# Altium PCB CCM4201S_MAIN_Board_V1-PIJIAKUN_20260819_PCB.PcbDoc
Units mm, origin at the board's own origin, x right, y up, seen from the top; angles counter-clockwise.
Board outline 50 x 30 mm, 2 copper layers (Top Layer, Bottom Layer); 74 components, 59 nets, 225 pads, 142 vias.
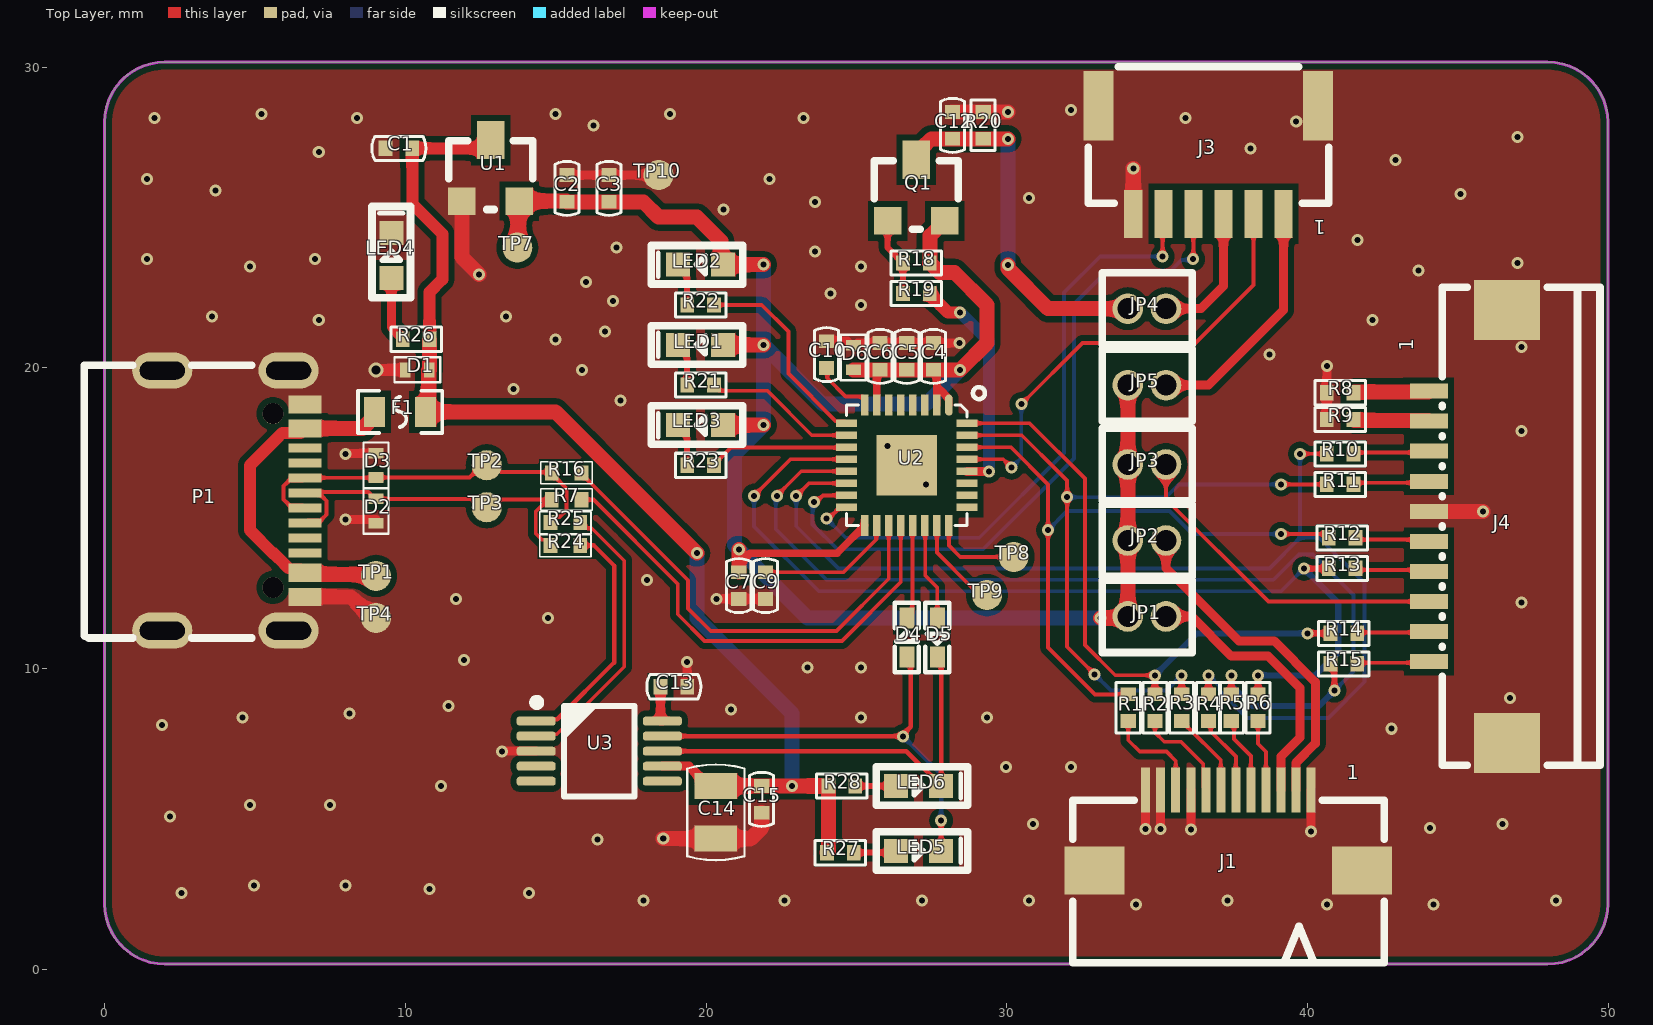
[diagram p0: Top Layer view]
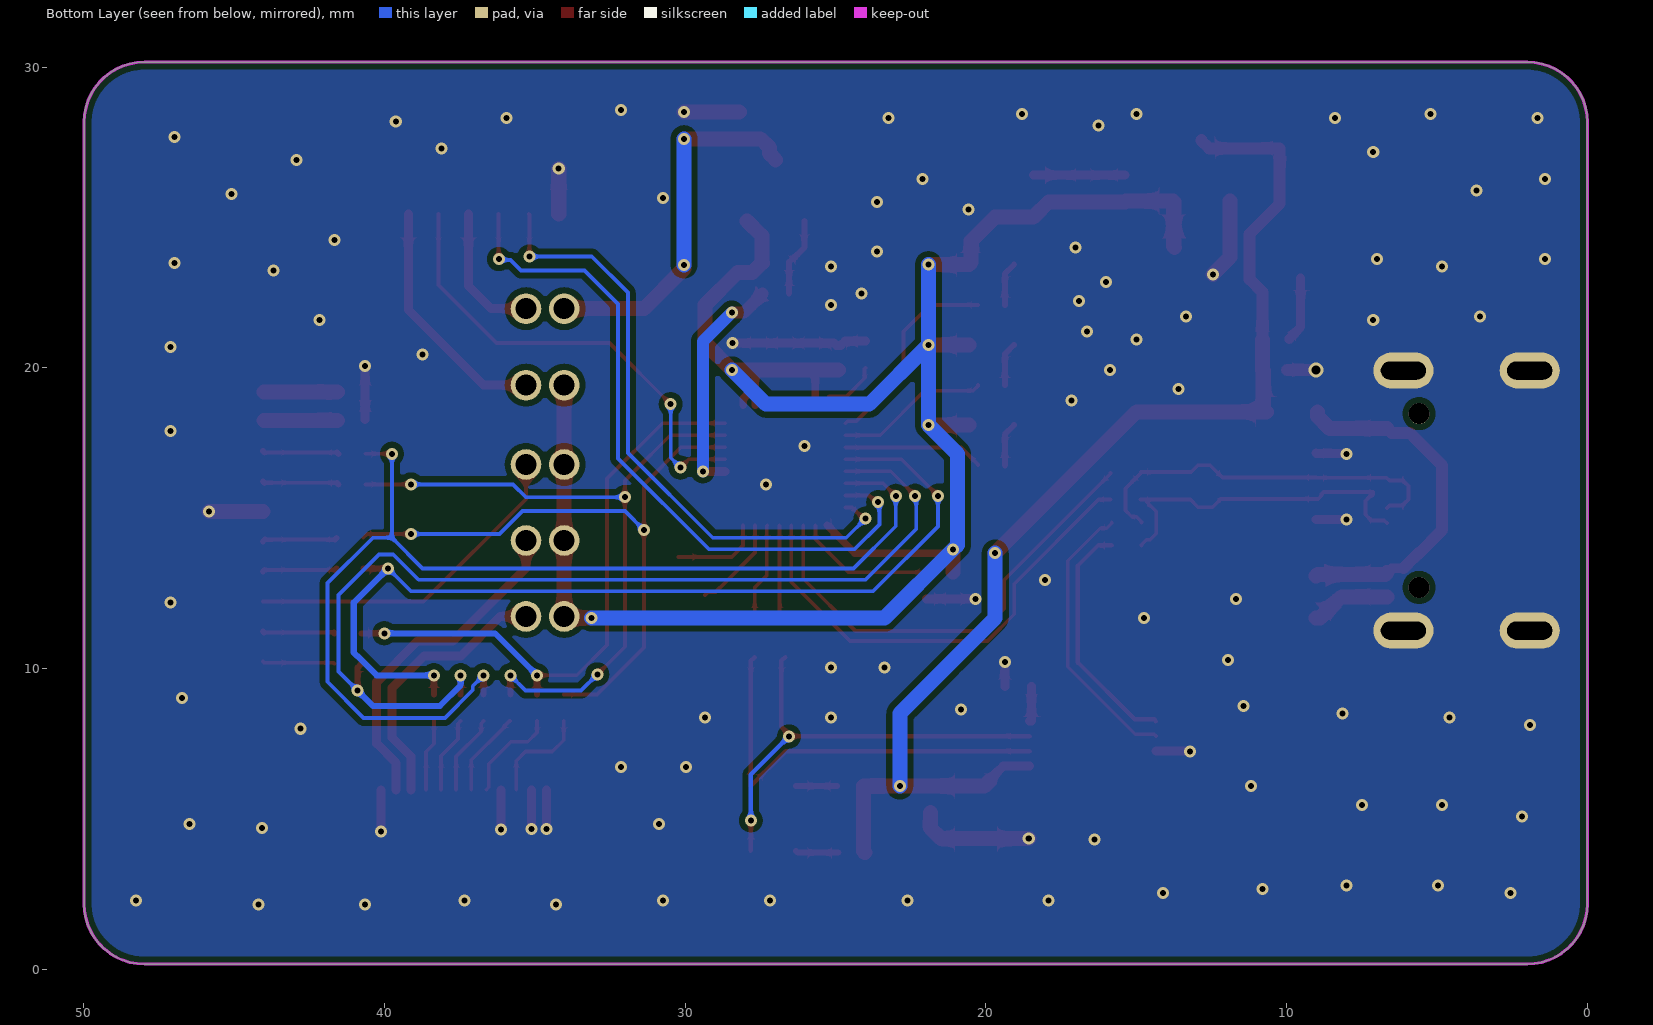
[diagram p1: Bottom Layer view, seen from below]

## Layer stack, top to bottom
Top Solder: solder mask 0.0102, Solder Resist, Dk 3.5
Top Layer: signal copper 0.0356
Dielectric 1: dielectric 0.32, FR-4, Dk 4.8
Bottom Layer: signal copper 0.0356
Bottom Solder: solder mask 0.0102, Solder Resist, Dk 3.5

## Board outline
-0.011,2.173 -0.011,28.173 cw(c1.989,28.173) 1.989,30.173 47.989,30.173 cw(c47.989,28.173) 49.989,28.173 49.989,2.173 cw(c47.989,2.173) 47.989,0.173 1.989,0.173 cw(c1.989,2.173)

## Design rules (kind name [scope] priority, off if disabled: settings)
BoardOutlineClearance [All] p1: gap=0 ignorepadtopadclearanceinfootprint=FALSE
Clearance GND_POUR [InPolygon] p1: gap=0.2 ignorepadtopadclearanceinfootprint=FALSE
Clearance Clearance_1 [All] p2: gap=0.01 ignorepadtopadclearanceinfootprint=FALSE
HoleToHoleClearance [All] p1: gap=0 allowstackedmicrovias=TRUE
MinimumSolderMaskSliver [All] p1: minsoldermaskwidth=0
PolygonConnect [All] p1: connectstyle=Direct reliefconductorwidth=0.254 reliefentries=4 polygonreliefangle="90 Angle" airgapwidth=0.254
RoutingVias [All] p1: holewidth=0.711 width=1.27 viastyle="Through Hole" minholewidth=0.711 minwidth=1.27 maxholewidth=0.711 maxwidth=1.27
SilkToSilkClearance [All] p1: silktosilkclearance=0
SilkToSolderMaskClearance [IsPad] p1: minsilkscreentomaskgap=0 clearancetoexposedcopper=TRUE
SolderMaskExpansion [All] p1: expansion=0.102 istentingtop=FALSE
Width [All] p1: maxlimit=1 minlimit=0.1 preferedwidth=0.2
26 further rules are at their usual default settings.

## Components (designator, comment, footprint, x,y, rotation, side; value= is the part's Value field where it differs from the comment)
C1 "1uF/16V" 0402C 9.779,27.305 r180 top
C2 "4.7uF/6.3V" 0402C 15.367,25.971 r90 top
C3 "0.1uF" 0402C 16.764,25.971 r90 top
C4 "4.7uF" 0402C 27.559,20.383 r90 top
C5 "0.1uF" 0402C 26.67,20.383 r90 top
C6 "0.1uF" 0402C 25.781,20.383 r270 top
C7 "0.1uF" 0402C 21.082,12.763 r270 top
C9 "0.1uF" 0402C 21.971,12.763 r270 top
C10 "1uF" 0402C 24.003,20.447 r90 top
C12 "2.2uF" 0402C 28.194,28.067 r90 top
C13 "0.1uF" 0402C 18.923,9.398 r0 top
C14 "10uF" L0805 20.32,5.221 r270 top
C15 "0.1uF" 0402C 21.844,5.651 r270 top
D1 "SES1201NT/SSC" TVS0402(M) 10.389,19.939 r0 top
D2 "ESD5311N-2/TR" TVS0402(M) 9.017,15.24 r90 top
D3 "ESD5311N-2/TR" TVS0402(M) 9.017,16.764 r270 top
D4 "B0520X" SOD523 26.67,11.034 r270 top value=B0520
D5 "B0520X" SOD523 27.686,11.034 r90 top value=B0520
D6 "RSD6368FT" TVS0402(M) 24.892,20.345 r90 top value=RSFK9D3NT
F1 "FUSE" 0603-PUSE 9.818,18.542 r0 top value=500MA
J1 "PIN-12" PIN-12 37.366,4.629 r180 top locked
J3 "PIN6-CON" XH6PIN_1.0MM 36.703,26.924 r180 top locked
J4 "AFA01-S10FCA-00" FPC-SMD_10P-P1.0_FGS-XJ-H2.0 45.339,14.732 r270 top locked
JP1 "CONDIP2_A" PAIZHEN-1.27-2P 34.671,11.736 r0 top locked value=4.2V/0.5A
JP2 "CONDIP2_A" PAIZHEN-1.27-2P 34.671,14.263 r0 top locked value=4.2V/0.5A
JP3 "CONDIP2_A" PAIZHEN-1.27-2P 34.671,16.79 r0 top locked value=4.2V/0.5A
JP4 "CONDIP2_A" PAIZHEN-1.27-2P 34.671,21.971 r0 top value=4.2V/0.5A
JP5 "CONDIP2_A" PAIZHEN-1.27-2P 34.671,19.431 r0 top value=4.2V/0.5A
LED1 "LED_G" LED_G 19.812,20.701 r180 top
LED2 "LED_B" LED_G 19.812,23.368 r180 top
LED3 "LED_R" LED_G 19.812,18.034 r180 top
LED4 "LED_R" LED_G 9.458,23.736 r90 top
LED5 "LED_R" LED_G 27.062,4.004 r0 top
LED6 "LED_R" LED_G 27.062,6.163 r0 top
P1 "TYPE-C_16PIN_2MD(073)" USB-C-SMD_TYPE-C-6PIN-2MD-073 4.283,15.59 r270 top locked
Q1 "CJ3139K/SOT23" SOT23 26.987,25.883 r0 top
R1 "R0402" 0402R 34.036,8.7 r270 top value=0R
R2 "R0402" 0402R 34.925,8.7 r270 top value=0R
R3 "R0402" 0402R 35.814,8.7 r270 top value=0R
R4 "R0402" 0402R 36.703,8.7 r270 top value=0R
R5 "R0402" 0402R 37.465,8.7 r270 top value=0R
R6 "R0402" 0402R 38.354,8.7 r270 top value=0R
R7 "R0402" 0402R_RANGE 15.303,15.621 r0 top value=0R
R8 "R0402" 0402R 41.084,19.177 r0 top value=0R
R9 "R0402" 0402R 41.084,18.288 r0 top value=0R
R10 "R0402" 0402R 41.084,17.145 r0 top value=0R
R11 "R0402" 0402R 41.084,16.129 r0 top value=0R
R12 "R0402" 0402R 41.148,14.351 r0 top value=0R
R13 "R0402" 0402R 41.148,13.335 r0 top value=0R
R14 "R0402" 0402R 41.212,11.176 r0 top value=0R
R15 "R0402" 0402R 41.212,10.16 r0 top value=0R
R16 "R0402" 0402R_RANGE 15.303,16.51 r0 top value=0R
R18 "100K" 0402R 26.987,23.495 r0 top
R19 "1K" 0402R 26.987,22.479 r180 top
R20 "20K" 0402R 29.21,28.067 r270 top
R21 "1K" 0402R 19.812,19.431 r180 top
R22 "1K" 0402R 19.812,22.098 r180 top
R23 "1K" 0402R 19.812,16.764 r180 top
R24 "33R" 0402R_RANGE 15.367,14.097 r180 top
R25 "33R" 0402R_RANGE 15.367,14.859 r180 top
R26 "1K" 0402R 10.351,20.955 r0 top
R27 "1K" 0402R 24.459,3.877 r180 top
R28 "1K" 0402R 24.511,6.096 r180 top
TP1 "TP12" TPAA 9.017,13.081 r90 top
TP2 "TP12" TPAA 12.7,16.764 r0 top
TP3 "TP12" TPAA 12.7,15.367 r0 top
TP4 "TP12" TPAA 9.017,11.684 r90 top
TP7 "TP12" TPAA 13.716,24.003 r90 top
TP8 "TP12" TPAA 30.226,13.716 r90 top
TP9 "TP12" TPAA 29.337,12.446 r90 top
TP10 "TP12" TPAA 18.415,26.416 r90 top
U1 "ME6230A33M3G/MICRONE" SOT23-3 12.827,26.543 r0 top
U2 "CCM4201S_QFN32" QFN32_4X4_0.4 26.67,16.764 r270 top
U3 "CH340E" MSOP-10 16.442,7.255 r0 top

## Footprints (in the part's own frame and the unit in brackets; to place one, negate y for a bottom-side part, rotate by r counter-clockwise, add the part's x,y. Pads: shape width x height; smd on the part's side, far side on the other; paste and mask are expansions set on the pad)
0402C [mil]
  rect 18x20 smd: 1(-17.5,0) 2(17.5,0)
  silkscreen extent -35,-16 35,16
0402R [mil]
  rect 18x20 smd: 1(-17.5,0) 2(17.5,0)
  silkscreen extent -33,-16 33,16
0402R_RANGE [mil]
  rect 18x20 smd: 1(-17.5,0) 2(21.44,0)
  silkscreen extent -31,-14 35,15
0603-PUSE [mm]
  rect 0.7x1 smd: 1(-0.85,0) 2(0.85,0)
  silkscreen extent -1.4,-0.7 1.4,0.7
FPC-SMD_10P-P1.0_FGS-XJ-H2.0 [mm]
  rect 0.5x1.25 smd: 1(-4.499,-1.3) 2(-3.499,-1.3) 3(-2.499,-1.3) 4(-1.499,-1.3) 5(-0.499,-1.3) 6(0.501,-1.3) 7(1.5,-1.3) 8(2.501,-1.3) 9(3.5,-1.3) 10(4.5,-1.3)
  rect 2x2.2 smd: 11(7.2,1.3) 12(-7.2,1.3)
  silkscreen extent -7.95,-0.86 7.94,4.39
L0805 [mil]
  rect 34x56 smd: 1(-34.45,0) 2(34.45,0)
  silkscreen extent -62,-38 63,38
LED_G [mm]
  rrect0% 0.8x0.8 smd: 1(-0.749,-0.067) 2(0.751,-0.067)
  silkscreen extent -1.4,-0.7 1.64,0.58
MSOP-10 [mm]
  rrect67% 1.3x0.3 smd: 1(-2.1,1) 2(-2.1,0.5) 3(-2.1,0) 4(-2.1,-0.5) 5(-2.1,-1) 6(2.1,-1) 7(2.1,-0.5) 8(2.1,0) 9(2.1,0.5) 10(2.1,1)
  silkscreen extent -2.2,-1.5 1.17,1.74
PAIZHEN-1.27-2P [mm]
  round 1.02 hole 0.7: 1(-0.65,0) 2(0.62,0)
  silkscreen extent -1.5,-1.2 1.5,1.2
PIN-12 [mm]
  rect 0.3x1.5 smd: 1(-2.75,-1.34) 2(-2.25,-1.34) 3(-1.75,-1.34) 4(-1.25,-1.34) 5(-0.75,-1.34) 6(-0.25,-1.34) 7(0.25,-1.34) 8(0.75,-1.34) 9(1.25,-1.34) 10(1.75,-1.34) 11(2.25,-1.34) 12(2.75,-1.34)
  rect 2x1.6 smd: 13(-4.45,1.34) 14(4.45,1.34)
  silkscreen extent -5.18,-0.99 5.18,4.41
QFN32_4X4_0.4 [mm]
  oval 0.7x0.25 smd: 1(-2,1.4)
  rect 0.7x0.25 smd: 2(-2,1) 3(-2,0.6) 4(-2,0.2) 5(-2,-0.2) 6(-2,-0.6) 7(-2,-1) 8(-2,-1.4) 17(2,-1.4) 18(2,-1) 19(2,-0.6) 20(2,-0.2) 21(2,0.2) 22(2,0.6) 23(2,1) 24(2,1.4)
  rect 0.25x0.7 smd: 9(-1.4,-2) 10(-1,-2) 11(-0.6,-2) 12(-0.2,-2) 13(0.2,-2) 14(0.6,-2) 15(1,-2) 16(1.4,-2) 25(1.4,2) 26(1,2) 27(0.6,2) 28(0.2,2) 29(-0.2,2) 30(-0.6,2) 31(-1,2) 32(-1.4,2)
  rect 2x2 smd: 33(0,0)
  silkscreen extent -2.6,-2 2,2.6
SOD523 [mm]
  rect 0.7x0.5 smd: A(0.65,0) K(-0.65,0)
  silkscreen extent -1.15,-0.4 1.15,0.4
SOT23 [mil]
  rect 36x36 smd: 1(-37.5,-39) 2(37.5,-39)
  rect 36x50 smd: 3(0,41)
  silkscreen extent -55,-50 55,40
SOT23-3 [mil]
  rect 36x36 smd: 1(-37.5,-39) 2(37.5,-39)
  rect 36x50 smd: 3(0,41)
  silkscreen extent -55,-50 55,40
TPAA [mm]
  round 1 smd: 1(0,0)
TVS0402(M) [mm]
  rect 0.35x0.5 smd: 1(-0.406,0) 2(0.406,0)
  silkscreen extent -0.76,-0.41 0.76,0.41
USB-C-SMD_TYPE-C-6PIN-2MD-073 [mm]
  rect 0.6x1.1 smd: 1(-3.2,2.375) 2(-2.4,2.375) 11(2.4,2.375) 12(3.2,2.375)
  rect 0.3x1.1 smd: 3(-1.75,2.375) 4(-1.25,2.375) 5(-0.75,2.375) 6(-0.25,2.375) 7(0.25,2.375) 8(0.75,2.375) 9(1.25,2.375) 10(1.75,2.375)
  oval 1.2x2 hole 0.6 slot 1.5 at 90 deg: 13(-4.325,1.825) 13(-4.325,-2.375) 14(4.325,1.825) 14(4.325,-2.375)
  round 0.7 hole 0.7 unplated mask+0.102: 15(-2.89,1.305) 16(2.89,1.305)
  silkscreen extent -4.5,-4.97 4.57,0.6
XH6PIN_1.0MM [mm]
  rect 0.6x1.6 smd paste+0 mask+0.05: 1(-2.5,1.8) 2(-1.5,1.8) 3(-0.5,1.8) 4(0.5,1.8) 5(1.5,1.8) 6(2.5,1.8)
  rect 1x2.3 smd paste+0 mask+0.05: 7(3.65,-1.8) 8(-3.65,-1.8)
  silkscreen extent -4,-3.1 4,1.45

## Part data
C1 C2: library part C0603X, "CAP, 10UF, 20%, 10V, X5R, 0603", Manufacturer="muRata (村田)", Manufacturer #1="村田 muRata", Geometry.Height=1.45000mm, PCB DECAL=0402C, PCB_DECAL=C0805, Process=SMT
C3 C5 C6 C7 C9: library part C0402, "CAP, 0.1uF, 10%, 10V, X5R, 0402", Manufacturer #1="村田 muRata", PCB DECAL=0402C
C4 C10: library part C0402, "CAP, 1UF, 10%, 10V, X5R, 0402", Manufacturer #1="村田 muRata", PCB DECAL=0402C
C12: library part C0201, "CAP, 2.2uF, 10%, 10V, X5R, 0201", Manufacturer #1="村田 muRata", PCB DECAL=0402C
C13 C15: library part C0201, "CAP, 0.1uF, 10%, 10V, X5R, 0201", Manufacturer #1="村田 muRata", PCB DECAL=0402C, Source_Path="D:\王君资料\客户资料\奥美佳\TDC5502\SCHEMATIC\改过原理图\TDC5502 1210B56101MN32SSD32FTD020EARIGBT.DSN"
C14: library part CAP+, "CAP, 10uF, 10%, 16V  6.3*5.3mm SMD", Geometry.Height=1.19990mm, PCB DECAL=L0805
D1: library part TVS0402(M), "TVS/12V", Manufacturer #1=MOTOROLA, Part Number=1.5KE220, PCB DECAL=TVS0402(M), Source_Path=D:\工作资料\指纹锁\电子烟\TF30X原理图\TF30X-GSL6165S-V00.DSN
D2 D3: library part TVS0402(M), "TVS/5V", Manufacturer #1=MOTOROLA, Part Number=1.5KE220, PCB DECAL=TVS0402(M), Source_Path=D:\工作资料\指纹锁\电子烟\TF30X原理图\TF30X-GSL6165S-V00.DSN
D4 D5: library part DIODE, PCB DECAL=SOD523
D6: library part TVS0402(M), "TRANSIENT VOLTAGE SUPPRESSOR, VBR=220V", Manufacturer #1=MOTOROLA, Part Number=1.5KE220, Geometry.Height=1.10007mm, PCB DECAL=TVS0402(M), Source_Path=D:\工作资料\指纹锁\电子烟\TF30X原理图\TF30X-GSL6165S-V00.DSN
J4: BOM_JLCPCB_Part_Class="Extended Part", BOM_Manufacturer=JUSHUO, BOM_Manufacturer_Part=AFA01-S10FCA-00, BOM_Supplier=LCSC, BOM_Supplier_Part=C262756, Contributor="1.0MM FPC连接座", PCB DECAL=FPC-SMD_10P-P1.0_FGS-XJ-H2.0, spicePre=F, spiceSymbolName=AFA01-S10FCA-00
JP1 JP2 JP3 JP4 JP5: "Rechargeable Battery", PCB DECAL=PAIZHEN-1.27-2P
LED1 LED2 LED3 LED4 LED5 LED6: library part OLED, Geometry.Height=1.100mm, PCB DECAL=LED_G
P1: Current_Rating___Power_(Max)=5A, JLCPCB_Part_Class="Extended Part", Manufacturer_Part="TYPE-C 16PIN 2MD(073)", Add_into_BOM=yes, Connector_Type=Type-C, Convert_to_PCB=yes, Datasheet=https://atta.szlcsc.com/upload/public/pdf/source/20211123/39B17C16241EAC15C5E277BDA434118E.pdf, Device="TYPE-C 16PIN 2MD(073)", Name=', Number_of_Contacts=16, Number_of_Ports=1, PCB DECAL=USB-C-SMD_TYPE-C-6PIN-2MD-073, Standard=-, supplier=LCSC, Supplier_Footprint=SMD, Supplier_Part=C2765186, Symbol="TYPE-C 16PIN 2MD(073)"
Q1: library part PMOS, "SOT23", Manufacturer #1=长电科技, PCB DECAL=SOT23
R1 R2 R3 R4 R5 R6 R7 R8 R9 R10 R11 R12 R13 R14 R15 R16: "RES,330R, 5%, 1/10W, 0201, SMD", Manufacturer #1=Yageo, Part_Name="RES 0201", PCB DECAL=0402R
R18 R19: library part R0402H, "RES 0603  4.7KΩ±1%  1/8W", PCB DECAL=0402R, PCB_DECAL=R0603, Process=SMT, Specification=spec
R20 R21 R22 R23 R26 R27 R28: library part R0402, "RES,20K, 5%, 1/10W, 0201, SMD", Manufacturer #1=Yageo, Part_Name="RES 0201", PCB DECAL=0402R
R24 R25: library part R0201, PCB DECAL=0402R, Source_Path="C:\PROGRAM FILES\ORCAD\CAPTURE\LIBRARY\DISCRETE.OLB"
TP1 TP2 TP3 TP4 TP7 TP8 TP9 TP10: "测试点，不需要贴片", PCB DECAL=TPAA
U1: library part TCS2115_C33, "3.3V  SOT23-3", Manufacturer #1=Torch_chip, PCB DECAL=SOT23-3
F1: PCB DECAL=0603-PUSE, Source_Path="C:\PROGRAM FILES\CADENCE\SPB_15.7\TOOLS\CAPTURE\LIBRARY\OLDLIBS\DEVICE.OLB"
J1: PCB DECAL=PIN-12
J3: PCB DECAL=XH6PIN_1.0MM
U2: PCB DECAL=QFN32_4X4_0.4
U3: Geometry.Height=1.09mm, PCB DECAL=MSOP-10

## Via types
v1: diameter 0.4, hole 0.2, Top Layer to Bottom Layer, tented both sides, 141 vias
v2: diameter 0.5, hole 0.3, Top Layer to Bottom Layer, tented both sides, 1 vias

## Nets (pads, with @x,y where several pads share a name; then routed paths per layer and width w, separated by ;. In a path a pad name is that pad's centre, name@x,y a point inside that pad or via, vN(x,y) a via of type N, cw(c..) or ccw(c..) an arc to the next point about the centre after c; other vN are vias at no path point)
5V: F1.1 P1.2 P1.11 TP1.1 | length 11.9
  Top Layer w0.3: 6.105,13.34 6.508,13.34 P1.11 ; P1.2@6.508,17.84 P1.2
  Top Layer w0.4: 5.587,13.843 4.826,14.604 4.826,16.764 5.715,17.653 5.902,17.84 P1.2@6.508,17.84 ; 5.588,13.843 5.593,13.838 ; 5.606,13.838 5.993,13.451 6.105,13.34
  Top Layer w0.5: P1.11 6.713,13.135 8.963,13.135 TP1.1 ; P1.2 7.874,17.99 8.566,17.99 8.968,18.392 F1.1
DM: R16.2 U2.19 | length 15.5
  Top Layer w0.127: R16.2 15.848,16.485 19.395,12.938 19.395,12.003 20.149,11.249 24.33,11.249 26.07,12.989 U2.19
DP: R7.2 U2.20 | length 15.9
  Top Layer w0.127: R7.2 16.249,15.621 19.05,12.82 19.05,11.811 19.939,10.922 24.511,10.922 26.47,12.881 U2.20
EGND1: J4.2 R9.2 | length 2.5
  Top Layer w0.2: R9.2 R9.2@41.558,18.259 ; J4.2@44.01,18.259 J4.2
  Top Layer w0.5: R9.2@41.558,18.259 J4.2@44.01,18.259
EGND2: J4.1 R8.2 | length 2.5
  Top Layer w0.2: R8.2 R8.2@41.556,19.204 ; J4.1@44.012,19.204 J4.1
  Top Layer w0.5: R8.2@41.556,19.204 J4.1@44.012,19.204
FP_INT: R5.1 R15.1 U2.13 | length 33.9
  Top Layer w0.127: v1(22.352,15.748) 22.352,15.756 22.911,16.315 23.16,16.564 U2.13
  Top Layer w0.2: R5.1 v1(37.465,9.779) ; R15.1 40.894,10.033 v1(40.894,9.271)
  Bottom Layer w0.127: v1(22.352,15.748) 22.311,15.707 22.311,14.646 24.003,12.954 38.862,12.954 39.706,13.798 40.177,13.798 41.529,12.446 41.529,9.906 v1(40.894,9.271)
  Bottom Layer w0.2: v1(37.465,9.779) 37.465,9.452 38.154,8.763 40.386,8.763 v1(40.894,9.271)
FP_RSTN: R6.1 R13.1 U2.12 | length 31.8
  Top Layer w0.127: v1(21.59,15.748) 22.806,16.964 U2.12
  Top Layer w0.2: R6.1 v1(38.354,9.779) ; v1(39.888,13.325) 39.893,13.33 40.698,13.33 R13.1
  Bottom Layer w0.127: v1(21.59,15.748) 21.59,14.732 23.749,12.573 39.116,12.573 39.868,13.325 v1(39.888,13.325)
  Bottom Layer w0.2: v1(38.354,9.779) 40.259,9.779 40.894,10.414 40.904,10.414 41.021,10.531 41.021,12.192 v1(39.888,13.325)
GND: C1.2 C2.2 C3.2 C4.2 C5.2 C6.1 C7.2 C9.2 C10.2 C12.2 C13.2 C14.2 C15.2 D1.1 D2.1 D3.1 D6.2 J1.1 J1.9 J1.11 J1.12 J1.13 J1.14 J3.6 J3.7 J3.8 J4.5 J4.11 J4.12 LED4.2 P1.1 P1.12 P1.13 P1.14 R8.1 R9.1 R20.1 TP4.1 TP10.1 U1.1 U2.33 U3.3 | length 35.6
  Top Layer w0.3: v1(8.001,14.961) D2.1@9.017,14.961 ; v1(8.001,17.145) 8.014,17.158 9.004,17.158 D3.1 ; v1(13.208,7.239) 13.224,7.255 U3.3 ; C2.2 C3.2 TP10.1 ; C13.2 v1(19.367,10.223) ; v1(20.335,12.319) C9.2 ; C10.2 24.677,20.892 24.817,20.752 D6.2 24.967,20.752 25.043,20.828 C6.1 C5.2 v1(28.418,20.828) ; v1(34.616,4.671) J1.12 ; v1(35.116,4.663) J1.11 ; v1(36.116,4.647) J1.9 ; v1(40.116,4.588) J1.1 ; R9.1 R8.1 v1(40.64,20.066)
  Top Layer w0.4: v2(9.017,19.939) D1.1
  Top Layer w0.5: P1.12 8.176,12.39 8.882,11.684 TP4.1 ; U1.1 11.874,23.685 v1(12.446,23.114) ; v1(18.57,4.346) C14.2 21.491,4.346 21.844,4.699 C15.2 ; C12.2 R20.1 v1(30.035,28.511) ; J3.6 v1(34.203,26.63) ; J4.5 v1(45.838,15.231)
  other v1: 34.29,2.159 40.64,2.159 44.196,2.159 17.907,2.286 22.606,2.286 27.178,2.286 30.734,2.286 37.338,2.286 48.26,2.286 2.54,2.54 14.097,2.54 10.795,2.667 4.953,2.794 8.001,2.794 16.383,4.318 44.069,4.699 30.861,4.826 46.482,4.826 2.159,5.08 4.826,5.461 7.493,5.461 11.176,6.096 29.972,6.731 32.131,6.731 42.799,8.001 1.905,8.128 4.572,8.382 25.146,8.382 29.337,8.382 8.128,8.509 20.828,8.636 11.43,8.763 46.736,9.017 23.368,10.033 25.146,10.033 11.938,10.287 14.732,11.684 47.117,12.192 11.684,12.319 18.034,12.954 27.305,16.129 26.035,17.399 47.117,17.907 17.145,18.923 13.589,19.304 15.875,19.939 38.735,20.447 47.117,20.701 14.986,20.955 16.637,21.209 7.112,21.59 42.164,21.59 3.556,21.717 13.335,21.717 25.146,22.098 16.891,22.225 24.13,22.479 16.002,22.86 43.688,23.241 4.826,23.368 25.146,23.368 46.99,23.495 1.397,23.622 6.985,23.622 23.622,23.876 17.018,24.003 41.656,24.257 20.574,25.273 23.622,25.527 30.734,25.654 45.085,25.781 3.683,25.908 1.397,26.289 22.098,26.289 42.926,26.924 7.112,27.178 38.1,27.305 46.99,27.686 16.256,28.067 39.624,28.194 1.651,28.321 8.382,28.321 23.241,28.321 35.941,28.321 5.207,28.448 14.986,28.448 18.796,28.448 32.131,28.575
INT_OUT: J3.2 U2.29 | length 15.6
  Top Layer w0.127: U2.29 29.878,16.964 v1(30.155,16.688) ; v1(30.48,18.796) 32.512,20.828 36.274,20.828 38.203,22.757 J3.2
  Bottom Layer w0.127: v1(30.155,16.688) 30.48,17.013 v1(30.48,18.796)
LED_B: R22.1 U2.9 | length 6.9
  Top Layer w0.127: R22.1 21.844,22.098 22.733,21.209 22.733,19.812 24.319,18.226 24.608,18.226 U2.9
LED_G: R21.1 U2.10 | length 5.1
  Top Layer w0.127: R21.1 20.256,19.406 20.422,19.241 22.034,19.241 23.511,17.764 U2.10
LED_R: R23.1 U2.11 | length 4.7
  Top Layer w0.127: R23.1 20.256,16.789 20.82,17.353 24.659,17.353 U2.11
MCU_RXD2: D5.A U2.22 | length 3.3
  Top Layer w0.127: U2.22 27.281,14.752 27.281,13.105 27.686,12.7 D5.A
MCU_TXD2: D4.K U2.21 | length 3.2
  Top Layer w0.127: D4.K 26.856,11.87 26.856,14.303 26.859,14.305 26.859,14.753 U2.21
NetC9_1: C9.1 U2.18 | length 4.6
  Top Layer w0.127: C9.1 24.562,13.208 25.659,14.305 25.659,14.753 U2.18
NetC10_1: C10.1 U2.8 | length 2.1
  Top Layer w0.127: C10.1 24.03,19.975 24.03,19.658 24.637,19.051 25.208,19.051 25.27,18.989 U2.8
NetC13_1: C13.1 U3.10 | length 1.2
  Top Layer w0.3: C13.1 18.479,8.255 U3.10
NetJ1_2: J1.2 JP2.2 | length 11.3
  Top Layer w0.3: JP2.2 35.291,13.35 37.719,10.922 38.885,10.922 40.259,9.548 40.259,7.512 39.616,6.869 J1.2
NetJ1_3: J1.3 JP1.2 | length 9.1
  Top Layer w0.3: JP1.2 36.143,11.736 37.465,10.414 38.686,10.414 39.751,9.349 39.751,7.711 39.116,7.076 J1.3
NetJ1_4: J1.4 R6.2 | length 2.4
  Top Layer w0.127: R6.2 38.354,7.5 38.616,7.238 J1.4
NetJ1_5: J1.5 R5.2 | length 2.6
  Top Layer w0.127: R5.2 37.556,8.164 37.556,7.656 38.116,7.096 J1.5
NetJ1_6: J1.6 R4.2 | length 2.7
  Top Layer w0.127: R4.2 36.782,8.176 36.782,7.91 37.616,7.076 J1.6
NetJ1_7: J1.7 R3.2 | length 2.8
  Top Layer w0.127: R3.2 35.839,8.255 36.005,8.09 36.005,8.064 37.116,6.953 J1.7
NetJ1_8: J1.8 R2.2 | length 3.3
  Top Layer w0.127: R2.2 34.925,7.874 35.233,7.566 35.791,7.566 36.529,6.828 36.529,6.73 36.529,6.055 J1.8
NetJ1_10: J1.10 R1.2 | length 3.5
  Top Layer w0.127: R1.2 34.036,7.62 34.417,7.239 35.306,7.239 35.616,6.929 J1.10
NetJ3_1: J3.1 JP5.2 | length 8.1
  Top Layer w0.3: JP5.2 36.703,19.431 39.203,21.931 J3.1
NetJ3_3: J3.3 JP4.2 | length 4.6
  Top Layer w0.3: JP4.2 36.449,21.971 37.203,22.725 J3.3
NetJ4_3: J4.3 R10.2 | length 2.5
  Top Layer w0.127: R10.2@41.572,17.188 J4.3@43.996,17.188
  Top Layer w0.2: R10.2 R10.2@41.572,17.188 ; J4.3@43.996,17.188 J4.3
NetJ4_4: J4.4 R11.2 | length 2.6
  Top Layer w0.127: R11.2@41.58,16.18 J4.4@43.988,16.18
  Top Layer w0.2: R11.2 R11.2@41.58,16.18 ; J4.4@43.988,16.18 J4.4
NetJ4_6: J4.6 R12.2 | length 2.5
  Top Layer w0.127: R12.2@41.652,14.291 J4.6@43.979,14.291
  Top Layer w0.2: R12.2 R12.2@41.652,14.291 ; J4.6@43.979,14.291 J4.6
NetJ4_7: J4.7 R13.2 | length 2.5
  Top Layer w0.127: R13.2@41.644,13.284 J4.7@43.987,13.284
  Top Layer w0.2: R13.2 R13.2@41.644,13.284 ; J4.7@43.987,13.284 J4.7
NetJ4_8: J4.8 JP3.2 | length 11.3
  Top Layer w0.127: JP3.2 35.291,15.636 38.696,12.231 J4.8
NetJ4_9: J4.9 R14.2 | length 2.4
  Top Layer w0.127: R14.2@41.684,11.204 J4.9@44.011,11.204
  Top Layer w0.2: R14.2 R14.2@41.684,11.204 ; J4.9@44.011,11.204 J4.9
NetJ4_10: J4.10 R15.2 | length 2.4
  Top Layer w0.127: R15.2 41.692,10.196 44.003,10.196 J4.10
NetLED1_2: LED1.2 R21.2 | length 1.5
  Top Layer w0.2: LED1.2 19.367,20.461 R21.2
NetLED2_2: LED2.2 R22.2 | length 1.5
  Top Layer w0.2: LED2.2 19.367,23.128 R22.2
NetLED3_2: LED3.2 R23.2 | length 1.5
  Top Layer w0.2: LED3.2 19.367,17.794 R23.2
NetLED4_1: LED4.1 R26.1 | length 2.2
  Top Layer w0.3: LED4.1 9.525,21.361 9.906,20.98 R26.1
NetLED5_1: LED5.1 R27.1 | length 1.4
  Top Layer w0.2: R27.1 24.907,3.881 26.257,3.881 LED5.1
NetLED6_1: LED6.1 R28.1 | length 1.4
  Top Layer w0.2: R28.1 LED6.1
NetQ1_1: Q1.1 R18.1 R19.2 | length 2.7
  Top Layer w0.2: Q1.1 26.035,24.003 26.389,23.649 26.414,23.649 R18.1@26.543,23.52 ; R19.2 R18.1@26.543,23.52 ; R18.1 R18.1@26.543,23.52
NetR24_1: R24.1 U3.1 | length 8
  Top Layer w0.15: U3.1 14.4,8.313 15.044,8.313 16.933,10.202 16.933,13.429 16.265,14.097 R24.1
NetR25_1: R25.1 U3.2 | length 9.4
  Top Layer w0.127: U3.2 14.406,7.819 15.028,7.819 17.272,10.062 17.272,13.589 16.192,14.668 15.977,14.668 15.811,14.834 R25.1
RXD: D4.A LED5.2 U3.9 | length 15.1
  Top Layer w0.15: U3.9 26.535,7.755 v1(26.543,7.747) 26.543,7.815 26.797,8.069 26.797,10.257 D4.A ; LED5.2 v1(27.813,4.953)
  Bottom Layer w0.15: v1(26.543,7.747) 27.813,6.477 v1(27.813,4.953)
RXD3: J3.5 U2.16 | length 20.7
  Top Layer w0.127: v1(24.003,14.986) 24.067,14.986 24.445,15.364 U2.16 ; v1(35.179,23.706) 35.179,25.1 J3.5
  Bottom Layer w0.127: v1(24.003,14.986) 24.638,14.351 29.083,14.351 31.904,17.172 31.904,22.506 33.104,23.706 v1(35.179,23.706)
SPI_CS: R4.1 R10.1 U2.14 | length 37.3
  Top Layer w0.127: v1(22.993,15.742) 23.415,16.164 U2.14 ; v1(39.751,17.145) R10.1
  Top Layer w0.2: R4.1 v1(36.703,9.779)
  Bottom Layer w0.127: v1(22.993,15.742) 22.993,14.738 24.396,13.335 38.735,13.335 39.751,14.351 ; v1(36.703,9.779) 37.065,9.417 37.065,9.286 37.988,8.363 40.693,8.363 41.892,9.562 41.892,12.845 40.386,14.351 39.751,14.351 ; v1(39.751,17.145) 39.751,14.351
SPI_MISO: R2.1 R14.1 U2.32 | length 20
  Top Layer w0.127: U2.32 30.751,18.164 32.594,16.321 32.594,10.791 33.606,9.779 v1(34.925,9.779)
  Top Layer w0.2: R2.1 v1(34.925,9.779) ; v1(40.005,11.176) R14.1
  Bottom Layer w0.2: v1(34.925,9.779) 36.322,11.176 v1(40.005,11.176)
SPI_MOSI: R3.1 R11.1 U2.31 | length 23.6
  Top Layer w0.127: U2.31 30.496,17.764 31.75,16.51 32.004,16.256 32.004,10.726 v1(32.92,9.809) ; v1(39.116,16.129) R11.1
  Top Layer w0.2: R3.1 v1(35.814,9.779)
  Bottom Layer w0.127: v1(32.004,15.703) 35.298,15.703 35.724,16.129 v1(39.116,16.129) ; v1(32.92,9.809) 33.459,9.271 35.306,9.271 v1(35.814,9.779)
SPI_SCK: R1.1 R12.1 U2.30 | length 21.9
  Top Layer w0.127: U2.30 30.134,17.364 31.369,16.129 v1(31.369,14.605) 31.369,10.705 32.93,9.144 R1.1 ; v1(39.116,14.478) 40.576,14.478 R12.1
  Bottom Layer w0.127: v1(31.369,14.605) 32.004,15.24 35.408,15.24 36.17,14.478 v1(39.116,14.478)
SWCLK: TP9.1 U2.23 | length 3.2
  Top Layer w0.127: U2.23 27.67,13.859 28.849,12.68 28.867,12.68 28.994,12.553 29.23,12.553 TP9.1
SWDIO: TP8.1 U2.24 | length 3
  Top Layer w0.127: U2.24 28.07,14.094 28.448,13.716 TP8.1
TXD: D5.K LED6.2 U3.8 | length 14.1
  Top Layer w0.15: U3.8 26.654,7.255 LED6.2 27.813,10.257 D5.K
TXD3: J3.4 U2.15 | length 23.5
  Top Layer w0.127: v1(23.579,15.537) 23.653,15.537 23.879,15.764 U2.15 ; v1(36.195,23.622) 36.203,23.63 J3.4
  Bottom Layer w0.127: v1(23.579,15.537) 23.54,15.498 23.54,14.794 24.364,13.97 29.21,13.97 32.231,16.991 32.231,22.125 33.348,23.242 35.455,23.242 35.805,23.592 36.165,23.592 v1(36.195,23.622)
USB_5V: C1.1 C14.1 C15.1 D1.2 F1.2 R26.2 R27.2 R28.2 U1.3 U3.7 | length 40.2
  Top Layer w0.3: U3.7 19.42,6.755 19.859,6.316 C14.1@19.859,6.278
  Top Layer w0.4: R26.2 10.795,22.521 11.225,22.951 11.225,24.463 10.223,25.464 C1.1 12.57,27.305 12.827,27.562 U1.3
  Top Layer w0.5: R26.2 D1.2 10.77,19.914 10.77,18.644 F1.2 14.986,18.542 v1(19.685,13.843) ; C14.1@19.859,6.278 20.041,6.096 C14.1 C15.1 v1(22.86,6.096) R28.2 24.066,3.929 24.035,3.898 24.035,3.881 24.031,3.877 R27.2
  Bottom Layer w0.5: v1(19.685,13.843) 19.685,11.684 22.86,8.509 v1(22.86,6.096)
USB_DM: D3.2 P1.5 P1.7 R16.1 R25.2 TP2.1 | length 12.8
  Top Layer w0.127: P1.7 6.572,15.427 6.141,15.427 5.945,15.622 5.945,16.077 6.122,16.254 6.572,16.254 6.667,16.349 9.008,16.349 D3.2 12.13,16.358 12.536,16.764 12.936,16.764 13.165,16.535 14.834,16.535 14.834,16.51 15.351,15.993 15.351,15.258 15.143,15.05 14.988,15.05 14.823,14.884 R25.2
USB_DP: D2.2 P1.6 P1.8 R7.1 R24.2 TP3.1 | length 11.7
  Top Layer w0.127: P1.8 6.745,14.927 7.172,14.927 7.272,15.027 7.276,15.027 7.372,15.122 7.372,15.584 7.201,15.754 7.145,15.754 7.112,15.786 P1.6@7.112,15.867 ; P1.6@7.112,15.875 8.756,15.875 8.831,15.801 8.831,15.758 8.942,15.646 12.184,15.646 12.464,15.367 TP3.1 12.936,15.367 13.19,15.621 R7.1@14.657,15.621 ; R24.2 14.823,14.122 14.657,14.287 14.539,14.287 14.33,14.496 14.33,15.222 14.657,15.549 R7.1@14.657,15.621 ; R7.1 R7.1@14.657,15.621
VDD_3.3V: C2.1 C3.1 C4.1 C5.1 C6.2 C7.1 D6.1 JP1.1 JP2.1 JP3.1 JP5.1 LED1.1 LED2.1 LED3.1 Q1.2 R18.2 TP7.1 U1.2 U2.1 U2.2 U2.7 U2.17 | length 71.9
  Top Layer w0.25: 21.082,13.462 21.463,13.843 24.349,13.843 U2.17 ; U2.7 25.67,19.835 25.774,19.939 C6.2 ; C4.1@27.566,19.939 27.67,19.835 U2.2 ; 27.686,19.373 28.07,18.989 U2.1
  Top Layer w0.5: TP7.1 13.748,24.035 13.748,25.521 U1.2 15.359,25.552 15.367,25.544 C2.1 C3.1 17.907,25.527 18.415,25.019 19.685,25.019 20.485,24.219 20.485,23.511 LED2.1 v1(21.904,23.435) ; LED3.1 v1(21.904,18.101) ; LED1.1 v1(21.904,20.768) ; C7.1 21.082,13.462 v1(21.082,13.97) ; D6.1 C6.2@25.774,19.939 ; C6.2 C5.1 C4.1 27.566,19.939 v1(28.448,19.939) 29.337,20.828 29.337,22.098 28.252,23.183 27.761,23.183 R18.2@27.449,23.495 ; R18.2 R18.2@27.449,23.495 ; Q1.2 27.449,24.401 R18.2@27.449,23.495 ; v1(33.108,11.684) 33.969,11.684 JP1.1 JP2.1 JP3.1 JP5.1
  Bottom Layer w0.5: v1(21.904,23.435) v1(21.904,20.768) ; v1(28.448,19.939) 27.305,18.796 23.876,18.796 v1(21.904,20.768) ; v1(33.108,11.684) 23.368,11.684 v1(21.082,13.97) 20.94,14.112 20.94,17.137 v1(21.904,18.101) v1(21.904,20.768)
VIN: C12.1 JP4.1 Q1.3 R20.2 | length 12.3
  Top Layer w0.5: Q1.3 27.195,27.131 27.195,27.33 27.488,27.622 C12.1 R20.2 v1(30.035,27.622) ; v1(30.035,23.431) 30.035,23.304 31.369,21.971 JP4.1
  Bottom Layer w0.5: v1(30.035,23.431) v1(30.035,27.622)
VIN_EN: R19.1 U2.28 | length 7.7
  Top Layer w0.3: U2.28 v1(29.41,16.564)
  Top Layer w0.4: R19.1 27.432,22.454 28.042,21.844 v1(28.448,21.844)
  Bottom Layer w0.4: v1(28.448,21.844) 29.41,20.882 v1(29.41,16.564)
pads on no net: P1.3 P1.4 P1.9 P1.10 P1.15 P1.16 U2.3 U2.4 U2.5 U2.6 U2.25 U2.26 U2.27 U3.4 U3.5 U3.6

## Polygon pours and split planes (outlines as drawn)
GND on Top Layer "GND_L01_P000" (hatched Horizontal grid 0.01 track 0.1, remove dead copper, pour order 0): 1.989,0.173 cw(c1.989,2.173) -0.011,2.173 -0.011,28.173 cw(c1.989,28.173) 1.989,30.173 47.989,30.173 cw(c47.989,28.173) 49.989,28.173 49.989,2.173 cw(c47.989,2.173) 47.989,0.173
GND on Bottom Layer "GND_L02_P001" (hatched Horizontal grid 0.01 track 0.1, remove dead copper, pour order 1): 1.989,0.173 cw(c1.989,2.173) -0.011,2.173 -0.011,28.173 cw(c1.989,28.173) 1.989,30.173 47.989,30.173 cw(c47.989,28.173) 49.989,28.173 49.989,2.173 cw(c47.989,2.173) 47.989,0.173

## Keep-outs
Keep-Out Layer:
  the board outline again, w0.1

## Other copper
Top Layer:
  pour cut-out: 24.67,15.364 24.67,18.164 25.27,18.764 25.27,18.796 28.038,18.796 28.67,18.164 28.67,15.364 28.07,14.764 25.27,14.764

## Text inside footprints (layer, text, board x,y; h text height)
J1: Top Overlay "1" at 41.303,6.153 h0.8
J3: Top Overlay "1" at 40.599,25.081 h0.8 r180
J4: Top Overlay "1" at 43.688,20.574 h0.8 r90